# Altium PCB PCB1.PcbDoc (part 1 of 2)
Units mil, origin at the board's own origin, x right, y up, seen from the top; angles counter-clockwise.
Board outline 6000 x 4000 mil, 2 copper layers (Top Layer, Bottom Layer); 40 components, 154 nets, 422 pads, 267 vias.
Unrouted connection lines stored in the file: 27.
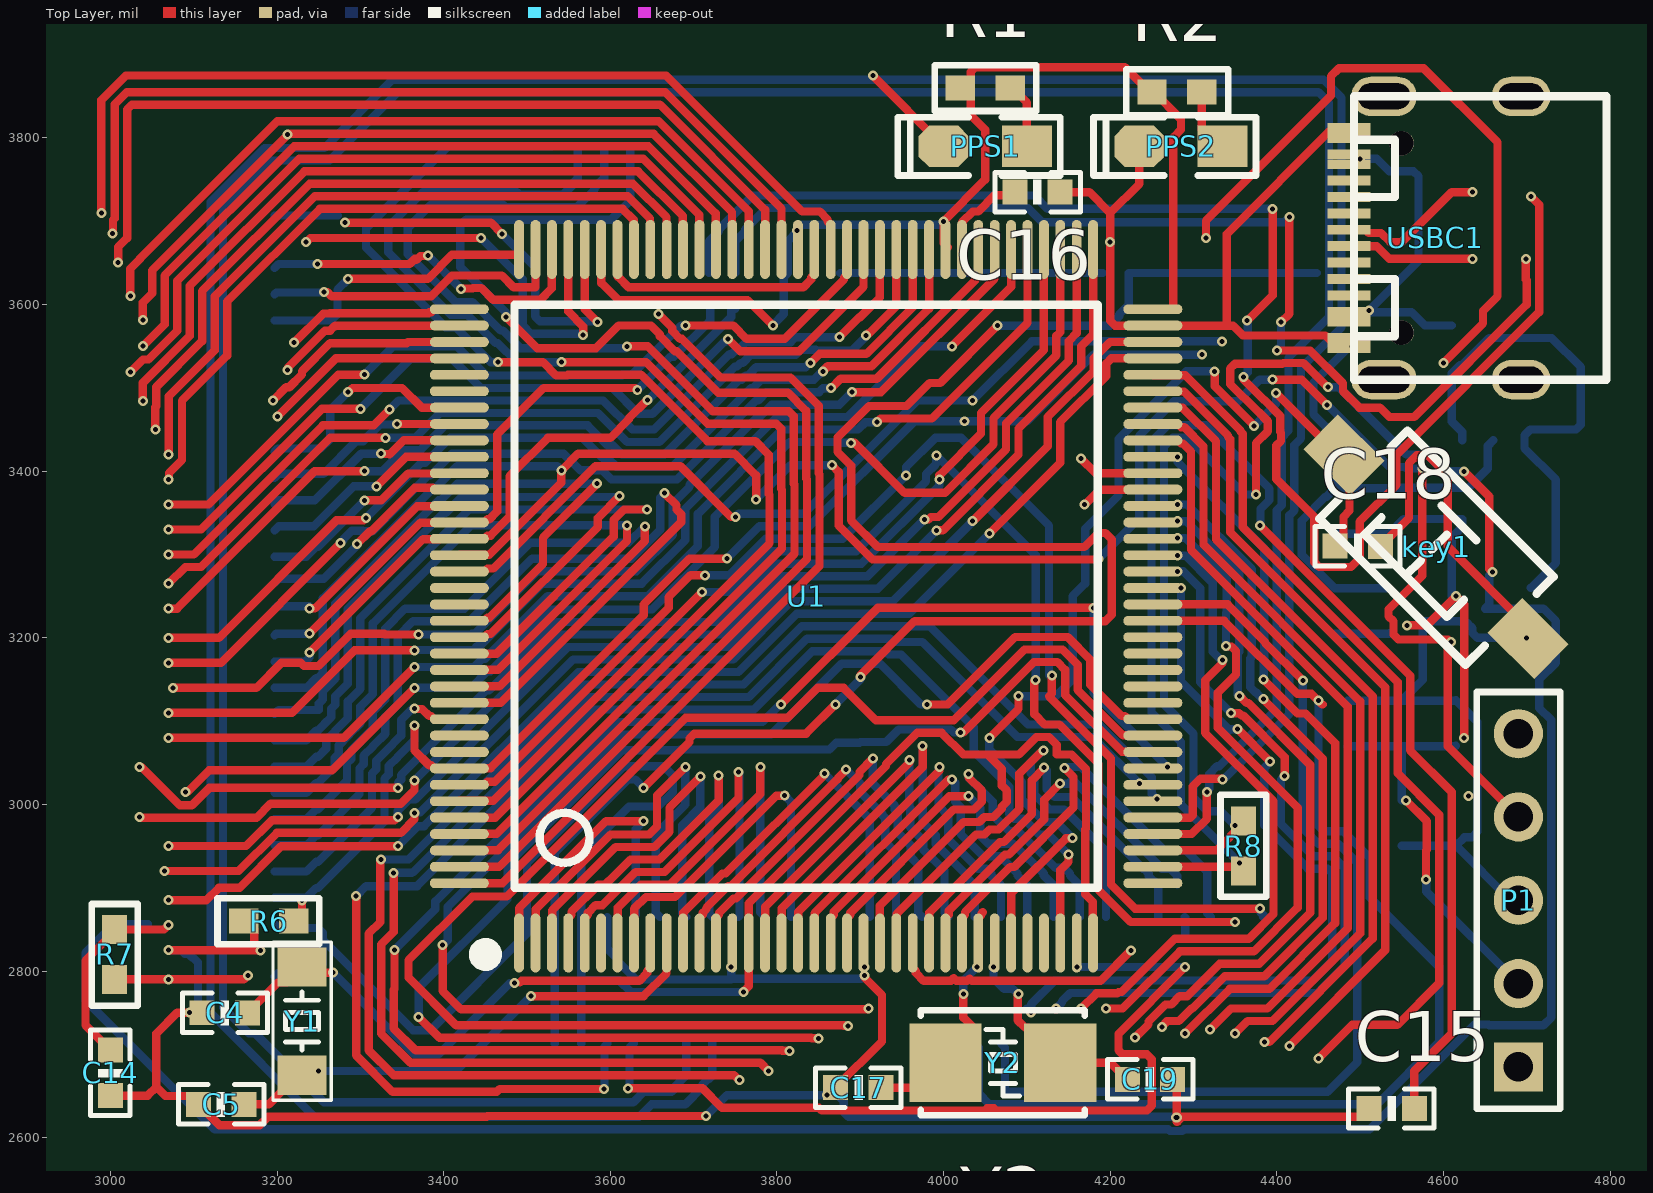
[diagram p0: Top Layer view]
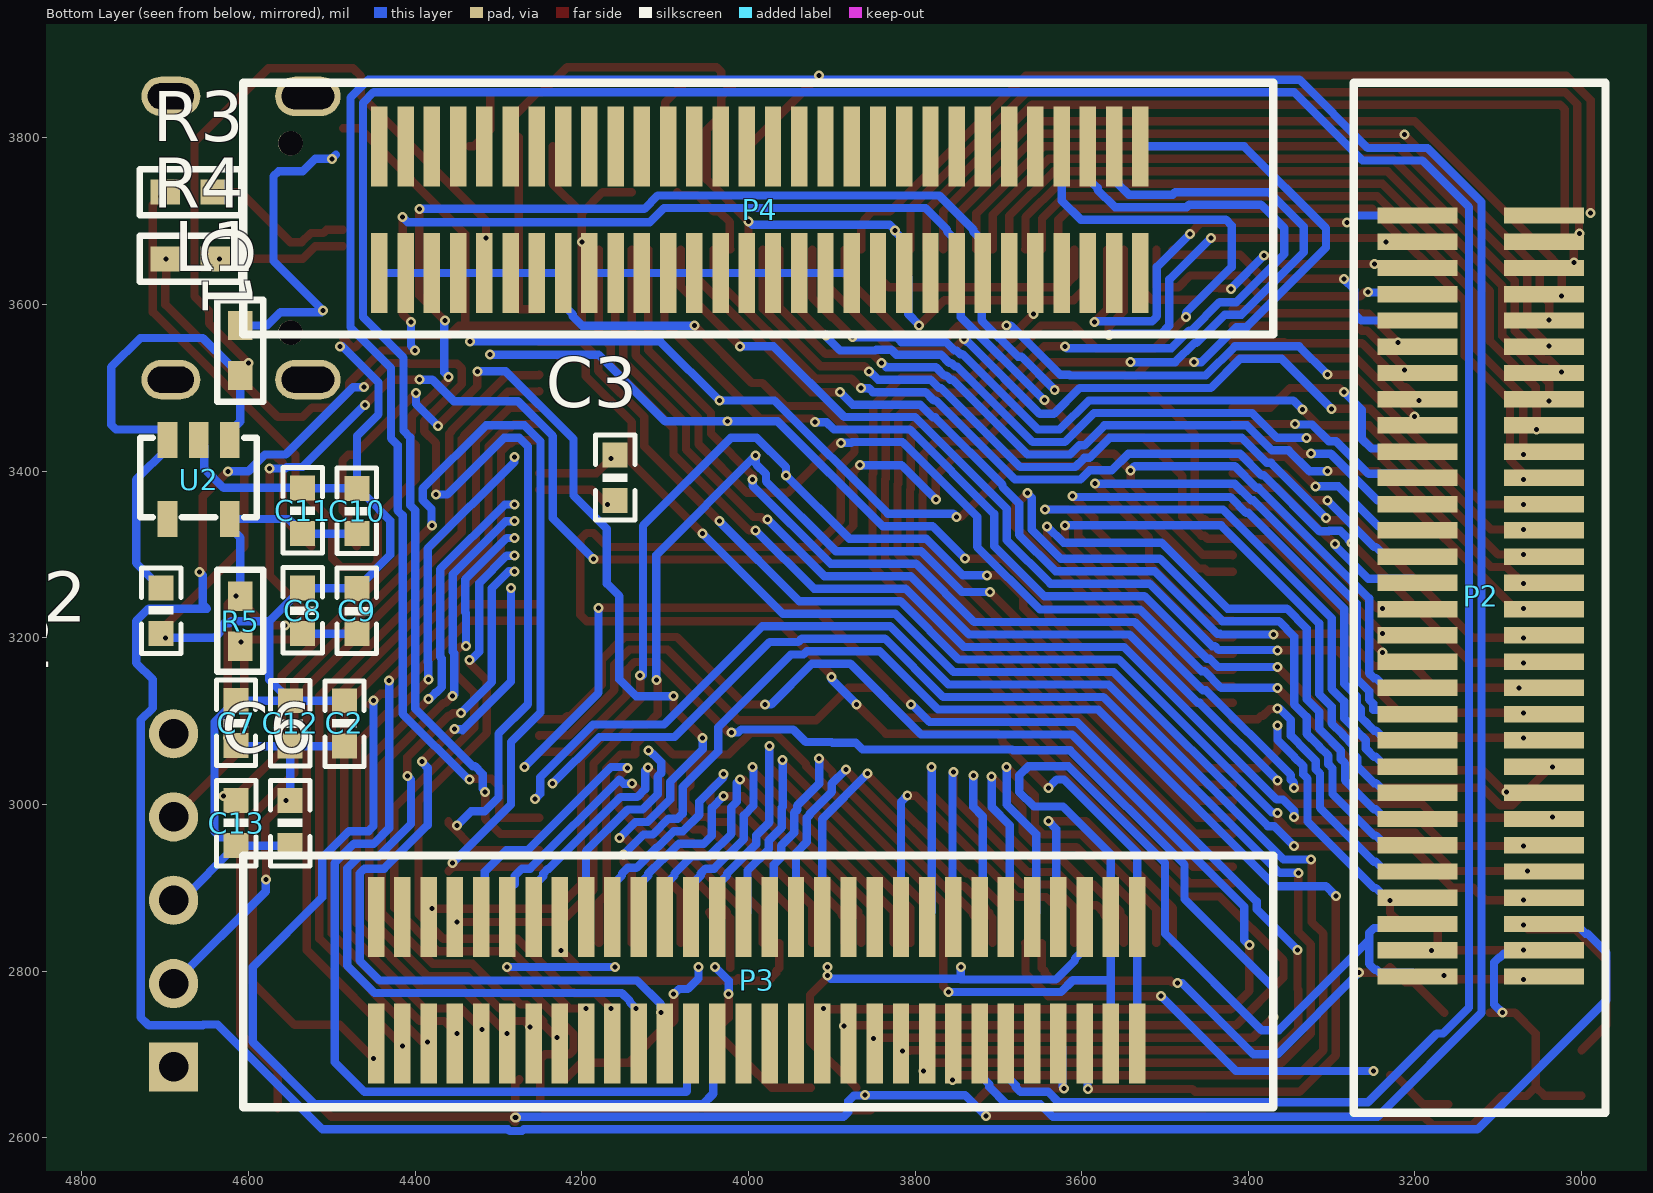
[diagram p1: Bottom Layer view, seen from below]

## Layer stack, top to bottom
Top Solder: solder mask 0.4, Solder Resist, Dk 3.5
Top Layer: signal copper 1.4
Dielectric 1: dielectric 12.6, FR-4, Dk 4.8
Bottom Layer: signal copper 1.4
Bottom Solder: solder mask 0.4, Solder Resist, Dk 3.5

## Board outline
1000,1000 7000,1000 7000,5000 1000,5000

## Design rules (kind name [scope] priority, off if disabled: settings)
Clearance [All] p1: gap=5 ignorepadtopadclearanceinfootprint=FALSE
PolygonConnect [All] p1: connectstyle=Relief reliefconductorwidth=10 reliefentries=4 polygonreliefangle="90 Angle" airgapwidth=10
RoutingVias [All] p1: holewidth=28 width=50 viastyle="Through Hole" minholewidth=28 minwidth=50 maxholewidth=28 maxwidth=50
SolderMaskExpansion [All] p1: expansion=4 istentingtop=FALSE
Width [All] p1: maxlimit=10 minlimit=10 preferedwidth=10
30 further rules are at their usual default settings.

## Components (designator, comment, footprint, x,y, rotation, side; value= is the part's Value field where it differs from the comment)
C1 "Cap Semi" 0603-C 4705,3260 r270 bottom value=105
C2 "Cap Semi" 0603-C 4484.94,3124.5 r270 bottom value=104
C3 "Cap Semi" 0603-C 4160,3365 r90 bottom value=105
C4 "" 0603-c 3110,2750 r0 top value=10P
C5 "" 0603-c 3105.5,2640.06 r0 top value=10P
C6 "" 0603-c 4550,3005 r270 bottom value=104
C7 "" 0603-c 4615.06,3070.5 r90 bottom value=104
C8 "" 0603-c 4535.06,3205.5 r90 bottom value=104
C9 "" 0603-c 4470,3205 r90 bottom value=104
C10 "" 0603-c 4470,3325 r90 bottom value=104
C11 "" 0603-c 4535.06,3325.5 r90 bottom value=106
C12 "" 0603-c 4550,3070 r90 bottom value=104
C13 "" 0603-c 4615,3005 r270 bottom value=2.2UF
C14 "" 0603-c 2999.94,2650.5 r90 top value=104
C15 "" 0603-c 4565,2635 r180 top value=104
C16 "" 0603-c 4085.5,3735.06 r0 top value=2.2UF
C17 "" 0603-c 3925,2660 r180 top value=20P
C18 "" 0603-c 4524.5,3309.94 r180 top value=104
C19 "" 0603-c 4220.5,2670.06 r0 top value=20P
key1 "KEY" "TSW SMD-3*6*2.5" 4590,3310 r135 top
L1 "L" 0603-r 4610,3515 r90 bottom
P1 "Header 5" HDR1X5 4690,2685 r90 top
P2 "Header 30X2" BTB60 3120,3250 r0 top locked
P3 "Header 30X2" BTB60 3989.92,2790 r270 top locked
P4 "Header 30X2" BTB60 3986.46,3713.03 r90 top locked
PPS1 "LED" "LED 0805G" 4050,3790 r180 top
PPS2 "LED" "LED 0805G" 4285,3790 r180 top
R1 "1k" 0603-R 4080,3860 r180 top
R2 "1k" 0603-r 4310,3855 r180 top
R3 "0Ω" 0603-r 4640,3735 r0 bottom
R4 "0Ω" 0603-r 4640,3655 r0 bottom
R5 "10K" 0603-r 4610,3250 r270 bottom
R6 "10K" 0603-r 3160,2860 r0 top
R7 "0" 0603-r 3005,2790 r90 top
R8 "0" 0603-r 4360,2980 r270 top
U1 "STM32H743IIT6" "LQFP144 20X20_N" 3835,3250 r0 top locked
U2 "RT9013" SOT23-5 4660,3390 r0 bottom
USBC1 "TYPE-C 3.1" TYPE-C-USB-17 4590,3680 r90 top
Y1 "32.768KHz" "OSC 3215-2P" 3230,2740 r90 top
Y2 "25M" "OSC 5032-2P" 4071.1,2690 r180 top

## Footprints (in the part's own frame and the unit in brackets; to place one, negate y for a bottom-side part, rotate by r counter-clockwise, add the part's x,y. Pads: shape width x height; smd on the part's side, far side on the other; paste and mask are expansions set on the pad)
0603-C [mil]
  rect 30x30 smd: 1(0,0) 2(54.5,-0.06)
  silkscreen extent -24,-24 79,24
0603-c [mil]
  rect 30x30 smd: 1(0,0) 2(54.5,-0.06)
  silkscreen extent -24,-24 79,24
0603-r [mil]
  rect 35x30 smd: 1(0,0) 2(60,0)
  silkscreen extent -31,-28 91,28, body extent -22,-19 82,19, height 39
0603-R [mil]
  rect 35x30 smd: 1(0,0) 2(60,0)
  silkscreen extent -31,-28 91,28, body extent -22,-19 82,19, height 39
BTB60 [mm]
  rect 2.44x0.5 smd far side: 1(-1.905,-11.594) 2(1.955,-11.594) 3(-1.905,-10.794) 4(1.955,-10.794) 5(-1.905,-9.994) 6(1.955,-9.994) 7(-1.905,-9.194) 8(1.955,-9.194) 9(-1.905,-8.394) 10(1.955,-8.394) 11(-1.905,-7.594) 12(1.955,-7.594) 13(-1.905,-6.794) 14(1.955,-6.794) 15(-1.905,-5.994) 16(1.955,-5.994) 17(-1.905,-5.194) 18(1.955,-5.194) 19(-1.905,-4.394) 20(1.955,-4.394) 21(-1.905,-3.594) 22(1.955,-3.594) 23(-1.905,-2.794) 24(1.955,-2.794) 25(-1.905,-1.994) 26(1.955,-1.994) 27(-1.905,-1.194) 28(1.955,-1.194) 29(-1.905,-0.394) 30(1.955,-0.394) 31(-1.905,0.406) 32(1.955,0.406) 33(-1.905,1.206) 34(1.955,1.206) 35(-1.905,2.006) 36(1.955,2.006) 37(-1.905,2.806) 38(1.955,2.806) 39(-1.905,3.606) 40(1.955,3.606) 41(-1.905,4.406) 42(1.955,4.406) 43(-1.905,5.206) 44(1.955,5.206) 45(-1.905,6.006) 46(1.955,6.006) 47(-1.905,6.806) 48(1.955,6.806) 49(-1.905,7.606) 50(1.955,7.606) 51(-1.905,8.406) 52(1.955,8.406) 53(-1.905,9.206) 54(1.955,9.206) 55(-1.905,10.006) 56(1.955,10.006) 57(-1.905,10.806) 58(1.955,10.806) 59(-1.905,11.606) 60(1.955,11.606)
HDR1X5 [mm] "Connector; Header; 5 Position"
  rect 1.5x1.5 hole 0.9: 1(0,0)
  round 1.5 hole 0.9: 2(2.54,0) 3(5.08,0) 4(7.62,0) 5(10.16,0)
  silkscreen extent -1.27,-1.27 11.43,1.27
"LED 0805G" [mil] "绿色0805LED"
  rect 60x50 smd: 1(-50,0)
  oct 60x50 smd: 2(50,0)
  silkscreen extent -90,-35 105,35, body extent -39,-25 39,25, height 32
"LQFP144 20X20_N" [mm] "144脚，体宽20x20mm，脚距0.5mm"
  oval 0.3x1.8 smd: 1(-8.75,-10.573) 2(-8.25,-10.573) 3(-7.75,-10.573) 4(-7.25,-10.573) 5(-6.75,-10.573) 6(-6.25,-10.573) 7(-5.75,-10.573) 8(-5.25,-10.573) 9(-4.75,-10.573) 10(-4.25,-10.573) 11(-3.75,-10.573) 12(-3.25,-10.573) 13(-2.75,-10.573) 14(-2.25,-10.573) 15(-1.75,-10.573) 16(-1.25,-10.573) 17(-0.75,-10.573) 18(-0.25,-10.573) 19(0.25,-10.573) 20(0.75,-10.573) 21(1.25,-10.573) 22(1.75,-10.573) 23(2.25,-10.573) 24(2.75,-10.573) 25(3.25,-10.573) 26(3.75,-10.573) 27(4.25,-10.573) 28(4.75,-10.573) 29(5.25,-10.573) 30(5.75,-10.573) 31(6.25,-10.573) 32(6.75,-10.573) 33(7.25,-10.573) 34(7.75,-10.573) 35(8.25,-10.573) 36(8.75,-10.573) 73(8.75,10.573) 74(8.25,10.573) 75(7.75,10.573) 76(7.25,10.573) 77(6.75,10.573) 78(6.25,10.573) 79(5.75,10.573) 80(5.25,10.573) 81(4.75,10.573) 82(4.25,10.573) 83(3.75,10.573) 84(3.25,10.573) 85(2.75,10.573) 86(2.25,10.573) 87(1.75,10.573) 88(1.25,10.573) 89(0.75,10.573) 90(0.25,10.573) 91(-0.25,10.573) 92(-0.75,10.573) 93(-1.25,10.573) 94(-1.75,10.573) 95(-2.25,10.573) 96(-2.75,10.573) 97(-3.25,10.573) 98(-3.75,10.573) 99(-4.25,10.573) 100(-4.75,10.573) 101(-5.25,10.573) 102(-5.75,10.573) 103(-6.25,10.573) 104(-6.75,10.573) 105(-7.25,10.573) 106(-7.75,10.573) 107(-8.25,10.573) 108(-8.75,10.573)
  oval 1.8x0.3 smd: 37(10.573,-8.75) 38(10.573,-8.25) 39(10.573,-7.75) 40(10.573,-7.25) 41(10.573,-6.75) 42(10.573,-6.25) 43(10.573,-5.75) 44(10.573,-5.25) 45(10.573,-4.75) 46(10.573,-4.25) 47(10.573,-3.75) 48(10.573,-3.25) 49(10.573,-2.75) 50(10.573,-2.25) 51(10.573,-1.75) 52(10.573,-1.25) 53(10.573,-0.75) 54(10.573,-0.25) 55(10.573,0.25) 56(10.573,0.75) 57(10.573,1.25) 58(10.573,1.75) 59(10.573,2.25) 60(10.573,2.75) 61(10.573,3.25) 62(10.573,3.75) 63(10.573,4.25) 64(10.573,4.75) 65(10.573,5.25) 66(10.573,5.75) 67(10.573,6.25) 68(10.573,6.75) 69(10.573,7.25) 70(10.573,7.75) 71(10.573,8.25) 72(10.573,8.75) 109(-10.573,8.75) 110(-10.573,8.25) 111(-10.573,7.75) 112(-10.573,7.25) 113(-10.573,6.75) 114(-10.573,6.25) 115(-10.573,5.75) 116(-10.573,5.25) 117(-10.573,4.75) 118(-10.573,4.25) 119(-10.573,3.75) 120(-10.573,3.25) 121(-10.573,2.75) 122(-10.573,2.25) 123(-10.573,1.75) 124(-10.573,1.25) 125(-10.573,0.75) 126(-10.573,0.25) 127(-10.573,-0.25) 128(-10.573,-0.75) 129(-10.573,-1.25) 130(-10.573,-1.75) 131(-10.573,-2.25) 132(-10.573,-2.75) 133(-10.573,-3.25) 134(-10.573,-3.75) 135(-10.573,-4.25) 136(-10.573,-4.75) 137(-10.573,-5.25) 138(-10.573,-5.75) 139(-10.573,-6.25) 140(-10.573,-6.75) 141(-10.573,-7.25) 142(-10.573,-7.75) 143(-10.573,-8.25) 144(-10.573,-8.75)
  silkscreen extent -10.03,-11.17 8.89,8.89, body extent -11,-11 11,11, height 1.45
"OSC 3215-2P" [mm] "3.2*1.5*0.6mm(长宽高)"
  rect 1.2x1.5 smd: 1(-1.65,0) 2(1.65,0)
  silkscreen extent -2.41,-0.89 2.41,0.89, body extent -1.6,-0.75 1.6,0.75, height 0.61
"OSC 5032-2P" [mm] "5mm*3.2mm*0.8mm(长*宽*高)"
  rect 2.2x2.4 smd: 1(-1.75,0) 2(1.75,0)
  silkscreen extent -2.5,-1.6 2.5,1.6, body extent -2.5,-1.6 2.5,1.6, height 0.86
SOT23-5 [mm]
  rect 0.6x1.1 smd: 1(-0.95,-1.2) 2(0,-1.2) 3(0.95,-1.2) 4(0.95,1.2) 5(-0.95,1.2)
  silkscreen extent -1.78,-1.27 1.78,1.14, body extent -1.55,-0.9 1.55,0.9, height 1.45
"TSW SMD-3*6*2.5" [mm] "3*6*2.5mm"
  rect 2x1.5 smd: 1(-3.996,-0.02) 2(3.937,0)
  silkscreen extent -3.21,-1.9 3.09,1.9, body extent -4,-1.88 4,1.62, height 2.59
TYPE-C-USB-17 [mm]
  oval 1.2x1.8 hole 0.8 slot 1.4 at 90 deg: 0(-4.32,-2.624) 0(4.32,-2.624)
  oval 1.2x2 hole 0.8 slot 1.6 at 90 deg: 0(-4.32,1.556) 0(4.32,1.556)
  rect 0.3x1.3 smd: A1(-3.35,2.623) A4(-2.55,2.623) A5(-1.25,2.623) A6(-0.25,2.623) A7(0.25,2.623) A8(-1.75,2.624) A9(2.55,2.623) A12(3.35,2.623) B1(3.05,2.623) B4(2.25,2.623) B5(1.75,2.623) B6(0.75,2.623) B7(-0.75,2.623) B8(1.25,2.624) B9(-2.25,2.623) B12(-3.05,2.623)
  round 0.75 hole 0.75 unplated: ""(-2.89,1.026) ""(2.89,1.026)
  silkscreen extent -4.32,-5.23 4.32,2.47

## Part data
C1 C2 C3: "Capacitor (Semiconductor SIM Model)", LatestRevisionDate=29-May-2009, LatestRevisionNote="IPC-7351 Footprint Added.", PackageDescription="Chip Capacitor", PackageReference=C1206, Published=8-Jun-2000, Publisher="Altium Limited"
C4 C5 C6 C7 C8 C9 C10 C11 C13 C14 C15 C16 C17 C18 C19: library part Cap_1_1, "Capacitor", LatestRevisionDate=17-Jul-2002, LatestRevisionNote="Re-released for DXP Platform.", PackageDescription="Radial Cap, Thru-Hole; 2 Leads; 0.3 in Pin Spacing", PackageReference=RAD-0.3, Published=8-Jun-2000, Publisher="Altium Limited"
C12: library part Cap_1_1, "104", LatestRevisionDate=17-Jul-2002, LatestRevisionNote="Re-released for DXP Platform.", PackageDescription="Radial Cap, Thru-Hole; 2 Leads; 0.3 in Pin Spacing", PackageReference=RAD-0.3, Published=8-Jun-2000, Publisher="Altium Limited"
P1: "Header, 5-Pin"
P2 P3 P4: "Header, 30-Pin, Dual row", LatestRevisionDate=17-Jul-2002, LatestRevisionNote="Re-released for DXP Platform.", Publisher="Altium Limited"
R1 R2 R3 R4 R5 R6 R7 R8: library part RES, "Resistor", LatestRevisionDate=17-Jul-2002, LatestRevisionNote="Re-released for DXP Platform.", PackageDescription="Axial Device, Thru-Hole; 2 Leads; 0.4 in Pin Spacing", PackageReference=AXIAL-0.4, Published=8-Jun-2000, Publisher="Altium Limited"
U1: BOM_LCSC Assembly=Yes, BOM_Manufacturer=STMicroelectronics, BOM_Manufacturer Part=STM32H743IIT6, BOM_Supplier=LCSC, BOM_Supplier Part=C89597, Contributor=LCSC, SMT Type=Extend, spicePre=U, spiceSymbolName=STM32H743IIT6
Y1 Y2: library part XTAL, "Crystal Oscillator", LatestRevisionDate=17-Jul-2002, LatestRevisionNote="Re-released for DXP Platform.", Published=8-Jun-2000, Publisher="Altium Limited"

## Via types
v1: diameter 12, hole 6, Top Layer to Bottom Layer, 267 vias

## Nets (pads, with @x,y where several pads share a name; then routed paths per layer and width w, separated by ;. In a path a pad name is that pad's centre, name@x,y a point inside that pad or via, vN(x,y) a via of type N, cw(c..) or ccw(c..) an arc to the next point about the centre after c; other vN are vias at no path point)
3.3V: C2.2 C3.2 C6.1 C7.1 C8.1 C9.1 C10.1 C11.1 C12.1 P1.2 P2.1 P2.2 P2.6 P3.3 P3.4 R1.2 R2.2 R5.1 R7.1 U1.15 U1.23 U1.36 U1.49 U1.62 U1.72 U1.82 U1.91 U1.103 U1.114 U1.127 U1.136 U2.5 | length 5238.3
  Top Layer w10: R7.1@3005,2790 3005.07,2790.07 v1(3069.93,2790.07) 3160.07,2790.07 v1@3165,2795 ; U1.103@3588.94,3666.26 3589.28,3665.91 3589.28,3625.72 3609.59,3605.41 3764.59,3605.41 v1(3795,3575) ; v1(3760,2775) 3760,2775.54 3766.1,2781.64 3766.1,2881.1 3931,3046 3931,3048.63 3968.37,3086 3997.75,3086 4023.75,3060 4052.63,3060 ; U1.23@3923.58,2833.74 3923.58,2878.53 4024.05,2979 4042.84,2979 4048.84,2985 4060,2985 4070,2995 4070,2997.37 4076,3003.37 4076,3016.63 4070,3022.63 4070,3042.63 4052.63,3060 ; U1.82@4002.32,3666.26 4005,3668.94 4000,3673.94 v1(4000,3700) 4050,3750 4050,3810 4032.5,3827.5 4032.5,3850 R1.2@4022.5,3860 ; R1.2@4020,3860 R1.2@4022.5,3860 ; v1(4165,3415) 4182.36,3397.64 U1.62@4251.26,3397.64 ; U1.36@4179.49,2833.74 4179.14,2834.09 4179.14,2883.18 4170,2892.32 4170,2970 4171,2971 4171,3042.79 4153.79,3060 4136,3060 4136,3071.63 4126.63,3081 4111.33,3081 4090.33,3060 4052.63,3060 ; U1.72@4251.26,3594.49 4274.95,3594.49 4275.79,3595.32 4275.79,3800.79 4285,3810 4285,3822.5 4252.5,3855 R2.2@4250,3855 4247.5,3855 4217.5,3885 4038.36,3885 4032.5,3879.14 4032.5,3870 R1.2@4022.5,3860 ; v1(4555,3005) 4580,2980 4580,2945.77 4579,2944.77 v1(4579,2910) ; v1(4556,3215) 4580,3215 v1(4615,3250) 4625,3240 v1(4625,3080)
  Bottom Layer w10: P2.2@3196.97,2793.54 3201.81,2798.39 3242.69,2798.39 3245.86,2801.55 3247.83,2801.55 3255,2808.72 3255,2837.37 ; P2.6@3196.97,2856.54 3201.81,2851.69 3249.14,2851.69 3255,2845.84 3255,2837.37 ; P3.4@3564.96,2713.03 3564.96,2789.02 ; v1(3760,2775) 3624.72,2775 3610.71,2789.02 3564.96,2789.02 ; v1(3795,3575) 3795,3575.54 3808.15,3588.69 3808.15,3633.19 3812.99,3638.03 3812.99,3676.22 3823.66,3686.89 3823.66,3688.62 v1(3824.05,3689) ; v1@3824.65,3690 3824.65,3690.21 3830.5,3696.06 3995.52,3696.06 3999.46,3700 v1(4000,3700) ; C9.1@4470,3205 4534.56,3205 C8.1@4535.06,3205.5 ; C10.1@4470,3325 4534.56,3325 C11.1@4535.06,3325.5 4552.32,3342.76 U2.5@4622.6,3342.76 4622.6,3332.91 4610,3320.31 R5.1@4610,3250 ; C2.2@4485,3070 C12.1@4550,3070 ; C6.1@4550,3005 C12.1@4550,3070 ; v1(4579,2910) 4579.38,2909.62 4579.38,2895.62 P1.2@4690,2785 ; C7.1@4615.06,3070.5 4614.56,3070 C12.1@4550,3070 ; 3255,2837.37 3363.18,2729.19 3363.18,2729.04 3363.21,2729 3384,2729 3500,2845 3500,2930 3615.86,3045.86 3664.14,3045.86 3675,3035 3675,3015 3657.5,2997.5 3622.5,2997.5 3564.96,2939.96 P3.3@3564.96,2865 3564.96,2789.02
  other v1: 3165,2794.75
5V: C1.1 L1.1 P3.1 P3.2 P4.1 P4.3 P4.5 P4.7 P4.9 P4.11 P4.13 P4.15 U2.1 U2.3 | length 3651.2
  Top Layer w10: v1(3640,3020) 3695,3075 3695,3079.14 3700.86,3085 3835,3085 v1@3870,3120 ; v1(3900,3153) 3900,3154.75 3965.25,3220 4194.14,3220 4202,3227.86 4202,3318 4194.14,3325.86 4185.86,3325.86 4169,3309 3921,3309 3889,3341 3889,3406.97 3872.75,3423.22 3872.75,3440.63 3910.46,3478.34 3955.71,3478.34 3983.37,3506 3996,3506 v1@4065,3575 ; v1(4315,3679.75) 4315,3700.86 4465,3850.86 4465,3874.14 4474.56,3883.7 4576.3,3883.7 4665,3795 4665,3610 4647.5,3592.5 4647.5,3577.5 v1@4600,3530
  Bottom Layer w10: P3.2@3533.46,2713.03 P3.1@3533.46,2865 3533.46,2942.25 3621.21,3030 3630,3030 3635,3025 ; v1(3870,3119.75) 3900,3149.75 v1(3900,3153) ; v1(4065,3574.75) 4199.68,3574.75 4210.79,3585.86 4210.79,3588.19 4222.44,3599.84 P4.15@4222.44,3638.03 P4.13@4253.94,3638.03 P4.11@4285.43,3638.03 P4.9@4316.93,3638.03 P4.7@4348.43,3638.03 P4.5@4379.92,3638.03 P4.3@4411.42,3638.03 P4.1@4442.91,3638.03 P4.1@4447.76,3638.03 ; U2.1@4622.6,3437.24 4622.6,3447.09 4610,3459.69 L1.1@4610,3515 4610,3517.5 4620,3527.5 4622.5,3527.5 4655,3560 4730,3560 4765,3525 4765,3455.86 4759.14,3450 4704.21,3450 4697.4,3443.19 U2.3@4697.4,3437.24 4697.4,3427.4 4735,3389.8 4735,3290 C1.1@4705,3260
  other v1: 4600,3529.75
BOOT0: P1.1
C0: P3.57 U1.32
C1: P3.59 U1.33
C2: P3.6 U1.34 | length 1788.4
  Top Layer w10: v1(3295,2890) 3295,2698.79 3338.72,2655.06 3463.62,2655.06 3467.11,2658.55 v1(3592.55,2658.55) ; U1.34@4140.12,2833.74 4140.12,2921.28 4150,2931.16 v1(4150,2940)
  Bottom Layer w10: v1(3295,2890) 3307,2902 3368.21,2902 3580.21,3114 3772.55,3114 3842.55,3184 3929.84,3184 3933.89,3179.95 3949.06,3179.95 4036.38,3092.63 4036.38,3063.62 4079,3021 4079,2988.89 4084.86,2983.03 4095.7,2983.03 4114.73,2964 4126,2964 v1(4150,2940) ; v1(3592.55,2658.55) 3592.93,2658.93 3592.93,2709.5 P3.6@3596.46,2713.03
C3: P3.8 U1.35 | length 1064.2
  Top Layer w10: v1(3621.37,2659) 3621.76,2659.38 3710.62,2659.38 3734.14,2635.86 3850.56,2635.86 3853.67,2632.76 4049.65,2632.76 4052.24,2635.34 4060.52,2635.34 4063.1,2632.76 4244.14,2632.76 4250,2638.61 4250,2694.14 4244.14,2700 4215,2700 4210,2705 4210,2724.75 v1(4290,2804.75)
  Bottom Layer w10: v1(3621.37,2659) 3621.37,2659.54 3623.11,2661.28 3623.11,2708.19 P3.8@3627.95,2713.03 ; v1(4160,2805) 4288.75,2805 4289,2804.75 v1(4290,2804.75)
GND: C1.2 C2.1 C3.1 C4.1 C5.1 C6.2 C7.2 C8.2 C9.2 C10.2 C11.2 C12.2 C13.2 C14.1 C15.2 C16.2 C17.2 C18.1 C19.2 key1.1 P1.3 P2.3 P2.4 P3.5 P4.17 P4.19 P4.21 P4.23 P4.25 P4.27 P4.29 P4.31 P4.33 P4.35 P4.37 PPS2.2 R6.1 U1.14 U1.22 U1.37 U1.48 U1.61 U1.71 U1.90 U1.102 U1.113 U1.126 U1.135 U2.2 USBC1.A1 USBC1.A12 USBC1.B1 USBC1.B12 | length 6058.7
  Top Layer w10: C14.1@2999.94,2650.5 3044.64,2650.5 3055,2660.86 ; v1(3069.93,2825.07) 3070,2825 v1(3180,2825) 3180,2825.54 3172.5,2833.04 3172.5,2850 3162.5,2860 R6.1@3160,2860 ; C4.1@3110,2750 v1(3095,2750) 3080,2750 3055,2725 3055,2660.86 ; U1.102@3608.62,3666.26 3608.97,3665.91 3608.97,3633.58 3621.72,3620.83 3831.75,3620.83 3841.06,3630.14 3841.06,3632.46 3844.84,3636.24 U1.90@3844.84,3666.26 ; v1(3715,2626) 3452.3,2626 3451.3,2625 3189.14,2625 3179.14,2615 3130.56,2615 3095.5,2650.06 3065.79,2650.06 3055,2660.86 ; C17.2@3870.5,2660.06 3926,2715.56 3926,2771.37 3905,2792.37 v1(3905,2794.75) ; C16.2@4140,3735 4175,3735 4200,3710 ; v1(4169,3360) 4170,3360 4187.95,3377.95 U1.61@4251.26,3377.95 ; PPS2.2@4235,3790 4235,3745 4200,3710 ; C19.2@4275,2670 4280,2665 v1(4280,2624) ; v1(4279.12,2624) v1(4280,2624) ; USBC1.A1@4475.59,3548.11 USBC1.A1@4486.73,3548.11 ; USBC1.B12@4486.73,3559.92 4475.59,3548.78 4472.43,3548.78 4458.21,3563 4359.27,3563 4347.46,3574.8 4340,3574.8 ; USBC1.A12@4486.73,3811.89 4467.04,3811.89 4340,3684.85 4340,3574.8 ; C15.2@4510.5,2635.06 4500.5,2625.06 4286.61,2625.06 4282.77,2621.23 4280.54,2619 4280,2619 v1(4280,2624) ; C18.1@4524.5,3309.94 4558.63,3344.06 4558.63,3409.63 4568,3419 4581.25,3419 4605.06,3395.19 4605.06,3309.94 4700,3215 v1(4700,3200) ; 4200,3710 v1(4200,3675) 4200,3580.66 4205.86,3574.8 U1.71@4251.26,3574.8 4340,3574.8
  Bottom Layer w10: v1(3069.93,2825.07) 3070,2825 3085,2825 3089.35,2820.65 3093.43,2820.65 3097.78,2816.3 3099.14,2816.3 3105,2810.44 3105,2760 v1(3095,2750) ; P3.5@3596.46,2865 3596.46,2826.81 3608.11,2815.16 3608.11,2812.83 3630.94,2790 3745,2790 ; v1(3715,2626) 3740.06,2651.06 v1(3860,2651.06) 3860.38,2650.68 3873.46,2650.68 3880,2644.14 3880,2630.86 3885.86,2625 4276,2625 4277,2624 v1(4280,2624) ; v1(3745,2805.02) 3745,2790 ; P4.37@3875.98,3638.03 P4.35@3907.48,3638.03 P4.33@3938.98,3638.03 P4.31@3970.47,3638.03 P4.29@4001.97,3638.03 P4.27@4033.46,3638.03 P4.25@4064.96,3638.03 P4.23@4096.46,3638.03 P4.21@4127.95,3638.03 P4.19@4159.45,3638.03 P4.17@4190.94,3638.03 ; v1@3905,2795 3901,2791 3746,2791 3745,2790 ; v1(4279.12,2624) v1@4279.56,2624.44 ; C2.1@4484.94,3124.5 C12.2@4549.94,3124.5 ; v1(4490,3550) 4487.37,3550 4444,3506.63 4444,3468.37 4469.94,3442.44 C10.2@4469.94,3379.5 ; C6.2@4550.06,2950.5 C13.2@4615.06,2950.5 ; U2.2@4660,3437.24 4653.19,3430.43 4653.19,3403.19 4630,3380 C11.2@4535,3380 4534.5,3379.5 C10.2@4469.94,3379.5 ; P1.3@4690,2885 4680.56,2885 C13.2@4615.06,2950.5 ; v1(4700,3200) 4640.86,3200 4635,3205.86 4635,3211.64 4629.14,3217.5 4623.36,3217.5 4620.86,3220 4575,3220 ; C10.2@4469.94,3379.5 4459.94,3369.5 4458.7,3369.5 4430,3340.8 4430,3299.44 C9.2@4469.94,3259.5 4534.5,3259.5 C8.2@4535,3260 4575,3220 ; C12.2@4549.94,3124.5 4575,3149.56 4575,3220 ; C12.2@4549.94,3124.5 4614.5,3124.5 C7.2@4615,3125 4641,3099 4641,2967.36 4634.14,2960.5 4625.06,2960.5 C13.2@4615.06,2950.5
  other v1: 3905,2804.75
NetC13_1: C13.1 U1.125 | length 1080.4
  Top Layer w10: U1.125@3418.74,3279.53 3448.76,3279.53 3452.54,3283.31 3459.52,3283.31 3582.26,3406.05 3683.95,3406.05 3745,3345 v1(3750,3345)
  Bottom Layer w10: v1(3750,3345) 3754,3349 3832.63,3349 3968.63,3485 v1(4035,3485) 4106,3556 v1(4334,3556)
NetC16_1: C16.1 U1.81 | length 110.9
  Top Layer w10: U1.81@4022.01,3666.26 4022.35,3666.61 4022.35,3698.94 4035.1,3711.69 4041.69,3711.69 4061.36,3731.36 4081.79,3731.36 C16.1@4085.5,3735.06
NetL1_2: L1.2 USBC1.A4 USBC1.A9 USBC1.B4 USBC1.B9 | length 378.3
  Bottom Layer w10: 4495,3780 4500,3775 4520,3775 4535,3760 4564.14,3760 4570,3754.14 4570,3652.38 v1(4510.79,3593.16) 4510.79,3592.62 4512.43,3590.98 4561.69,3590.98 4577.67,3575 L1.2@4610,3575
  other v1: 4500,3774.75
NetPPS1_1: PPS1.1 R1.1 | length 79.7
  Top Layer w10: R1.1@4080,3860 4082.5,3860 4100,3842.5 PPS1.1@4100,3790
NetPPS2_1: PPS2.1 R2.1 | length 78.3
  Top Layer w10: R2.1@4310,3855 4310,3810 4330,3790 PPS2.1@4335,3790
NetR3_1: R3.1 USBC1.A7 USBC1.B7 | length 179.3
  Top Layer w10: USBC1.A7@4486.73,3689.84 4506.41,3689.84 4510.19,3686.07 4525.15,3686.07 4536.21,3675 4550,3675 4610,3735 v1(4635,3735)
NetR4_1: R4.1 USBC1.A6 USBC1.B6 | length 154.6
  Top Layer w10: USBC1.A6@4486.73,3670.16 4519.84,3670.16 4535,3655 v1(4635,3655)
OSC_IN: C17.1 U1.29 Y2.2 | length 273
  Top Layer w10: C17.1@3925,2660 3972.2,2660 Y2.2@4002.2,2690 4040,2727.8 4023.75,2744.05 v1(4023.75,2772.31) ; U1.29@4041.69,2833.74 4041.69,2863.76 4045.47,2867.54 4045.47,2869.26 4047.04,2870.83
  Bottom Layer w10: v1(4023.75,2772.31) 4023.75,2788.75 v1(4040,2805)
OSC_OUT: C19.1 U1.30 Y2.1 | length 246.6
  Top Layer w10: v1(4090,2772.31) 4089,2771.31 4089,2741 4097.76,2732.24 4101.69,2732.24 4140,2693.94 Y2.1@4140,2690 4200.56,2690 C19.1@4220.5,2670.06
  Bottom Layer w10: v1(4060,2805) 4060,2791.15 4072.65,2778.5 4083.26,2778.5 4089.46,2772.31 v1(4090,2772.31)
PA0: P3.12 U1.40 | length 4000.9
  Top Layer w10: U1.40@4251.26,2964.57 4297.74,2964.57 4316,2982.83 v1(4316,3015)
  Bottom Layer w10: P3.12@3690.95,2713.03 3690.95,2674.84 3679.29,2663.19 3679.29,2660.86 3673.43,2655 3640,2655 3627.55,2642.55 3256.24,2642.55 3173.79,2725 3166.21,2725 3135,2756.21 3135,3716.98 3191.02,3773 3263,3773 3345,3855 4449.93,3855 4462.76,3842.17 4462.76,3585.13 4414,3536.37 4414,3448.72 4406,3440.72 4406,3359.22 4400,3353.22 4400,3115 4331,3046 4328.37,3046 4319,3036.63 4319,3019 4316,3016 v1(4316,3015)
PA1: P3.14 PPS1.2 U1.41 | length 4237.9
  Top Layer w10: v1(3915,3875) PPS1.2@4000,3790 ; U1.41@4251.26,2984.25 4296.21,2984.25 4299,2987.04 4299,3021.63 4308.37,3031 4334,3031 v1(4335,3030)
  Bottom Layer w10: P3.14@3722.44,2713.03 3722.44,2674.84 3717.6,2670 3716.65,2670 3710.79,2664.14 3710.79,2660.86 3689.93,2640 3649.41,2640 3634.41,2625 3245,2625 3120,2750 3120,3723.19 3184.81,3788 3256.79,3788 3338.79,3870 3915,3870 4456.14,3870 4477.76,3848.39 4477.76,3572.76 4429,3524 4429,3439.43 4421,3431.43 4421,3353.01 4415,3347.01 4415,3108.79 4336.21,3030 v1(4335,3030)
PA2: P3.16 U1.42 | length 1839.6
  Top Layer w10: v1(3325,2934) 3324,2933 3324,2859 3310,2845 3310,2705 3340,2675 3748.46,2675 3754.46,2669 v1(3755,2669)
  Bottom Layer w10: v1(3325,2934) 3357.79,2934 3567.79,3144 3760.12,3144 3830.12,3214 3983.37,3214 4101.37,3096 4186.63,3096 4250,3032.63 4250,3012.57 v1(4255.91,3006.72) v1(4255.91,3006.72)
PA3: P3.26 U1.47 | length 1704.4
  Top Layer w10: v1(3398.69,2831.31) 3398.69,2776.31 3421,2754 3909,2754 v1(3910,2755) ; v1(3980,3120) 4005,3120 4086,3201 4149.05,3201 4176,3174.05 4176,3143.85 4213.71,3106.14 4217.46,3106.14 4221.24,3102.36 U1.47@4251.26,3102.36
  Bottom Layer w10: v1(3398.69,2831.31) 3399.14,2831.31 3405,2837.17 3405,2877.43 3611.57,3084 3792.79,3084 3877.79,3169 3923.63,3169 3972.63,3120 v1(3980,3120)
PA4: P3.28 U1.50
PA5: P3.30 U1.51
PA6: P3.32 U1.52
PA7: P3.34 U1.53 | length 1380.6
  Top Layer w10: U1.53@4251.26,3220.47 4336.85,3220.47 4424.6,3132.72 4441.74,3132.72 4454.46,3120 4455,3120
  Bottom Layer w10: P3.34@4037.4,2713.03 4042.24,2708.19 4042.24,2652.76 4055,2640 4520,2640 4595,2715 4595,2805 4511.69,2888.31 4511.69,2935.81 4479.48,2968.03 4455.86,2968.03 4450,2973.89 v1(4450,3125)
PA8: P2.34 U1.119 | length 263.3
  Top Layer w10: v1(3305,3365) 3325,3365 3357.29,3397.29 3418.39,3397.29 U1.119@3418.74,3397.64
  Bottom Layer w10: P2.34@3196.97,3297.48 3235.16,3297.48 3246.81,3309.13 3249.14,3309.13 3260.26,3320.25 3260.26,3320.37 3304.89,3365 v1(3305,3365)
PA9: P2.32 U1.120 | length 270.8
  Top Layer w10: v1(3296.15,3312.41) 3311.69,3327.96 3313.21,3327.96 3330,3344.75 3330,3345 3365,3380 3386.68,3380 3388.72,3377.95 U1.120@3418.74,3377.95
  Bottom Layer w10: P2.32@3196.97,3265.98 3201.81,3270.83 3255.97,3270.83 3295.77,3310.62 3295.77,3312.03 v1(3296.15,3312.41)
PA10: P2.30 U1.121 | length 274.2
  Top Layer w10: v1(3239,3235) 3239.38,3235.38 3245.38,3235.38 3367.92,3357.92 3418.39,3357.92 U1.121@3418.74,3358.27
  Bottom Layer w10: P2.30@3196.97,3234.49 3200.25,3237.77 P2.30@3239,3237.77
PA11/USB_DM: P2.28 P4.47 R3.2 U1.122 | length 2574
  Top Layer w10: v1(3239,3205) 3372.24,3338.24 3418.39,3338.24 U1.122@3418.74,3338.58 3448.76,3338.58 3452.54,3342.36 3454.86,3342.36 3464.17,3351.68 3464.17,3444.14 3520.03,3500 3629.95,3500 v1(3632.32,3497.63) ; v1(4360,3513) 4360,3510 4384.17,3485.83 4384.54,3485.83 4404.15,3466.22 4404.15,3447.22 4405,3446.36 4405,3436.56 4399.34,3430.9 4399.34,3390.66 4445,3345 4445,3290.86 4450.86,3285 4489.14,3285 4499.5,3295.36 4499.5,3339.5 4543.63,3383.63 4543.63,3419.59 4715,3590.96 4715,3720 v1@4705,3730 ; v1(4364.17,3580.72) 4364.71,3580.72 4395,3611.01 v1(4395,3715)
  Bottom Layer w10: P2.28@3196.97,3202.99 3198.98,3205 v1(3239,3205) ; v1(3632.32,3497.63) 3672.31,3537.61 3676.4,3537.61 3718.79,3580 3720,3581.21 P4.47@3720,3605 ; P4.47@3718.5,3638.03 3718.5,3676.22 3730.16,3687.87 3730.16,3690.21 3770.95,3731 4109,3731 4125,3715 v1(4395,3715) ; v1(4360,3513) 4360,3513.54 4365,3518.54 4365,3579.89 v1(4364.17,3580.72)
  other v1: 4705,3729.75
PA12/USB_DP: P2.26 P4.45 R4.2 U1.123 | length 2089.7
  Top Layer w10: v1(3239,3182.15) 3375.4,3318.55 3394.75,3318.55 U1.123@3395,3318.8 ; U1.123@3418.74,3318.9 3448.76,3318.9 3452.54,3322.68 3456.38,3322.68 3479.17,3345.47 3479.17,3394.17 3525,3440 3599.95,3440 3621.95,3462.01 3621.95,3463.22 v1(3644.34,3485.61) ; v1(4400,3545) 4440.01,3545 4479.38,3505.63 4479.38,3495.99 4499.07,3476.3 4523.7,3476.3 4535,3465 4565,3465 4700,3600 4700,3629.11 4699,3630.11 v1(4699,3654.75) ; v1(4405,3579) 4415,3589 v1(4415,3705)
  Bottom Layer w10: P2.26@3196.97,3171.5 3234.16,3171.5 3239,3176.34 v1(3239,3182.15) ; v1(3644.34,3485.61) 3644.72,3485.99 3645.99,3485.99 3745.16,3585.16 3745.16,3595 P4.45@3750,3595 ; P4.45@3750,3638.03 3750,3676.22 3761.65,3687.87 3761.65,3690.21 3787.45,3716 4101.37,3716 4118.37,3699 4409,3699 v1(4415,3705) ; v1(4400,3545) 4400,3545.54 4405,3550.54 v1(4405,3579)
"PA13 SWDIO": P1.4 P2.24 R5.2 U1.124 | length 2595.6
  Top Layer w10: U1.124@3418.74,3299.21 3419.09,3299.56 3454.48,3299.56 3540.99,3386.07 3540.99,3400.62 v1(3541.37,3401) 3561.42,3421.05 3748.95,3421.05 3775,3395 v1(3775,3366) ; v1(3866,3407.34) 3874,3399.34 3874,3334.79 3914.79,3294 4185.25,3294 v1(4186,3294.75) ; v1(4394.94,3510.18) 4395.12,3510 4429.75,3510 v1(4460,3479.75) ; v1(4574.63,3403) 4574.63,3274.63 4534.14,3234.14 4534.14,3225.86 4540,3220 4540,3203.79 4545.86,3197.93 4605.53,3197.93 4608.46,3195 v1(4609,3195) 4609,3194.46 4605,3190.46 4605,3070 P1.4@4690,2985
  Bottom Layer w10: P2.24@3196.97,3140 3235.16,3140 3246.81,3151.65 3249.14,3151.65 3255,3157.51 3255,3247.43 3387.57,3380 3390.15,3380 3416.15,3406 3536.37,3406 v1(3541.37,3401) ; v1(3775,3366) 3816.34,3407.34 v1(3866,3407.34) ; v1(4186,3294.75) 4234.69,3343.45 4234.69,3442.12 4276.57,3484 4353.63,3484 4379.42,3509.8 4394.56,3509.8 v1(4394.94,3510.18) ; v1@4460,3480 4535,3405 4554.14,3405 4555.76,3403.38 4574.24,3403.38 v1(4574.63,3403)
"PA14 SWCLK": P1.5 P2.8 R6.2 U1.137 | length 1526.8
  Top Layer w10: R6.2@3220,2860 3230,2870 v1@3230,2885 ; v1(3365,3095) 3365,3064.71 3382.62,3047.09 3384.94,3047.09 3388.72,3043.31 U1.137@3418.74,3043.31 3419.09,3043.65 3456.37,3043.65 3640,3227.28 3640,3240 3695,3295 v1(3740,3295)
  Bottom Layer w10: P2.8@3196.97,2888.03 3235.16,2888.03 3246.81,2899.69 3249.14,2899.69 3329,2979.54 3329,3030.96 3334,3035.96 3334,3046.24 3345,3057.24 3345,3057.43 3365,3077.43 v1(3365,3095) ; v1(3740,3295) 3779,3334 3838.84,3334 3964.84,3460 v1(4025,3460) 4100,3460 4180,3540 v1(4310,3540)
  other v1: 3230,2884.75
PA15: P3.55 U1.138 | length 1607.6
  Top Layer w10: U1.138@3418.74,3023.62 3448.76,3023.62 3452.54,3027.4 3461.34,3027.4 3670,3236.07 3670,3248.79 3696.51,3275.29 3712.92,3275.29 3713.14,3275.07 v1(3713.91,3275.07) ; v1(4130,3155) 4130,3133.21 4126.5,3129.71 4201,3055.21 4201,2903.75 4229.75,2875 v1(4380,2875)
  Bottom Layer w10: v1(3713.91,3275.07) 3742.7,3275.07 3786.63,3319 3879,3319 v1(3955,3395) 3955,3405 3990,3440 4021.21,3440 4126.5,3334.71 4126.5,3155 v1(4130,3155) ; v1(4380,2875) 4380,2871.14 4385,2866.14 P3.55@4383.86,2865
PB0: P3.40 U1.56 | length 953.6
  Top Layer w10: v1(4345,3110) 4345.38,3109.62 4354.71,3109.62 4357.59,3106.73 4359.73,3106.73 4409.42,3057.05 v1(4409.42,3034.42)
  Bottom Layer w10: v1(4135,2755) 4142.2,2762.2 4142.2,2763.86 4152.09,2773.75 4448.83,2773.75 4481.69,2806.61 4481.69,2923.39 4467.05,2938.03 4443.43,2938.03 4405,2976.46 4405,3030 v1(4409.42,3034.42) ; v1(4281,3279.88) 4287.75,3279.88 4308,3259.63 4308,3147 v1(4345,3110)
PB1: P3.42 U1.57 | length 779.4
  Top Layer w10: v1(4165,2755) 4183.31,2773.31 4208.31,2773.31 4210,2775 4213.79,2775 4277.47,2838.69 4366.31,2838.69 4396,2868.37 4396,3004 4314,3086 4314,3149 4334.62,3169.62 v1(4334.62,3173.57)
  Bottom Layer w10: v1(4281,3298.69) 4290.15,3298.69 4323,3265.84 4323,3183.37 4332.42,3173.96 4334.24,3173.96 v1(4334.62,3173.57)
PB2: P3.44 U1.58 | length 811.6
  Top Layer w10: v1(4195,2755) 4215,2755 4283.69,2823.69 4372.53,2823.69 4425,2876.16 4425,2996.21 4329,3092.21 4329,3134 4351,3156 4351,3184.14 4345.52,3189.62 4339.38,3189.62 v1(4339,3190)
  Bottom Layer w10: v1(4281,3319.82) 4290.23,3319.82 4340,3270.05 4340,3230.8 4339,3229.8 v1(4339,3190)
PB3: P4.26
PB4: P4.24
PB5: P4.22
PB6: P4.20
PB7: P4.18
PB8: P4.16
PB9: P4.14
PB10: P2.23 U1.79 | length 1252.4
  Top Layer w10: v1(3074.93,3140.07) 3175.07,3140.07 3205,3170 3228.52,3170 3232.37,3166.15 3249.74,3166.15 3288.59,3205 3328.52,3205 3329.52,3204 v1(3370,3204) ; v1(3890,3495) 3925,3495 4061.03,3631.03 4061.03,3665.91 U1.79@4061.38,3666.26
  Bottom Layer w10: v1(3370,3204) 3432.91,3204 3433.91,3205 3437.43,3205 3512.43,3280 3631.36,3280 3675,3323.64 3675,3361.21 3695,3381.21 3695,3383.79 3775.91,3464.7 3778.48,3464.7 3793.79,3480 3875,3480 v1(3890,3495)
PB11: P2.25 U1.80 | length 1223.7
  Top Layer w10: v1(3069.93,3170.07) 3132.59,3170.07 v1(3276.26,3313.74) ; v1(3865,3500) 3865.54,3500 3876.54,3511 3919.79,3511 4037.91,3629.13 4037.91,3632.46 4041.69,3636.24 U1.80@4041.69,3666.26
  Bottom Layer w10: v1(3276.26,3313.74) 3276.26,3314.28 3280.15,3318.17 3280.15,3319.04 3289.52,3328.41 3302.78,3328.41 3303.24,3327.96 3314.32,3327.96 3381.36,3395 3383.93,3395 3409.93,3421 3544,3421 3564,3401 3590.51,3401 3601.51,3390 3680,3390 3775,3485 3777.57,3485 3787.57,3495 3850.67,3495 3855.29,3499.62 3864.62,3499.62 v1(3865,3500)
PB12: P2.57 U1.92 | length 1069.5
  Top Layer w10: v1(3002.73,3685.21) 3003.11,3685.59 3003.11,3701.48 3005,3703.37 3005,3840.36 3019.64,3855 3665.73,3855 3805.47,3715.26 U1.92@3805.47,3666.26
PB13: P2.55 U1.93 | length 1056
  Top Layer w10: v1(3008.93,3650.74) 3009.31,3651.12 3009.31,3669.17 3020,3679.85 3020,3834.14 3025.86,3840 3659.52,3840 3785.79,3713.73 U1.93@3785.79,3666.26
PB14: P2.53 U1.94 | length 939.6
  Top Layer w10: v1(3023.93,3610.07) 3023.93,3643.11 3035,3654.18 3035,3655 3200,3820 3658.31,3820 3766.1,3712.2 U1.94@3766.1,3666.26
PB15: P2.51 U1.95 | length 911.2
  Top Layer w10: v1(3038.93,3581.42) 3038.93,3602.44 3050,3613.51 3050,3641 3212.47,3803.47 v1(3212.47,3804) ; v1@3213.39,3804.38 3214.01,3805 3652.09,3805 3746.07,3711.02 3746.07,3666.61 U1.95@3746.42,3666.26
PC4: P3.36 U1.54 | length 1214.7
  Top Layer w10: U1.54@4251.26,3240.16 4341,3240.16 4385.92,3195.24 4385.92,3194.02 v1(4431.22,3148.72)
  Bottom Layer w10: P3.36@4068.9,2713.03 4073.74,2708.19 4073.74,2655.86 4074.6,2655 4460.84,2655 4496.69,2690.86 4496.69,2929.6 4473.26,2953.03 4449.64,2953.03 4431.22,2971.45 v1(4431.22,3148.72)
PC5: P3.38 U1.55 | length 950.4
  Top Layer w10: v1(4353.11,3090.73) v1(4392.11,3051.73)
  Bottom Layer w10: v1(4105,2750) 4102.09,2752.91 4100,2755 4104.17,2755 4105.24,2756.06 4105.24,2760.24 4133.75,2788.75 4442.62,2788.75 4466.69,2812.83 4466.69,2917.17 4460.84,2923.03 4437.22,2923.03 4385,2975.25 4385,3044.09 4392.11,3051.19 v1(4392.11,3051.73) ; v1(4285,3260) 4285,3147.37 4343.23,3089.14 4344.44,3090.35 4352.72,3090.35 v1(4353.11,3090.73)
PC6: P2.42 U1.115 | length 283.8
  Top Layer w10: v1(3285,3495) 3285.54,3495 3290.54,3500 3350,3500 3373.62,3476.38 U1.115@3418.74,3476.38
  Bottom Layer w10: P2.42@3196.97,3423.46 3200.76,3427.26 3252.26,3427.26 3264,3439 3264,3474 v1(3285,3495)
PC7: P2.40 U1.116 | length 248.6
  Top Layer w10: v1(3344.19,3456.69) U1.116@3418.74,3456.69
  Bottom Layer w10: P2.40@3196.97,3391.97 3201.81,3396.81 3255.6,3396.81 3294.79,3436 3303.37,3436 3323.37,3456 3343.5,3456 v1(3344.19,3456.69)
PC8: P2.38 U1.117 | length 254.3
  Top Layer w10: v1(3325,3421) 3325.38,3420.62 3334.38,3420.62 3335,3420 3352.01,3437.01 U1.117@3418.74,3437.01
  Bottom Layer w10: P2.38@3196.97,3360.47 3201.81,3365.32 3245.32,3365.32 3301,3421 v1(3325,3421)
PC9: P2.36 U1.118 | length 258.4
  Top Layer w10: v1(3319.19,3381.81) 3354.7,3417.32 U1.118@3418.74,3417.32
  Bottom Layer w10: P2.36@3196.97,3328.98 3201.81,3333.82 3243.82,3333.82 3291.81,3381.81 v1(3319.19,3381.81)